# EAGLE board picotouchsynth (EAGLE 9.6.2)
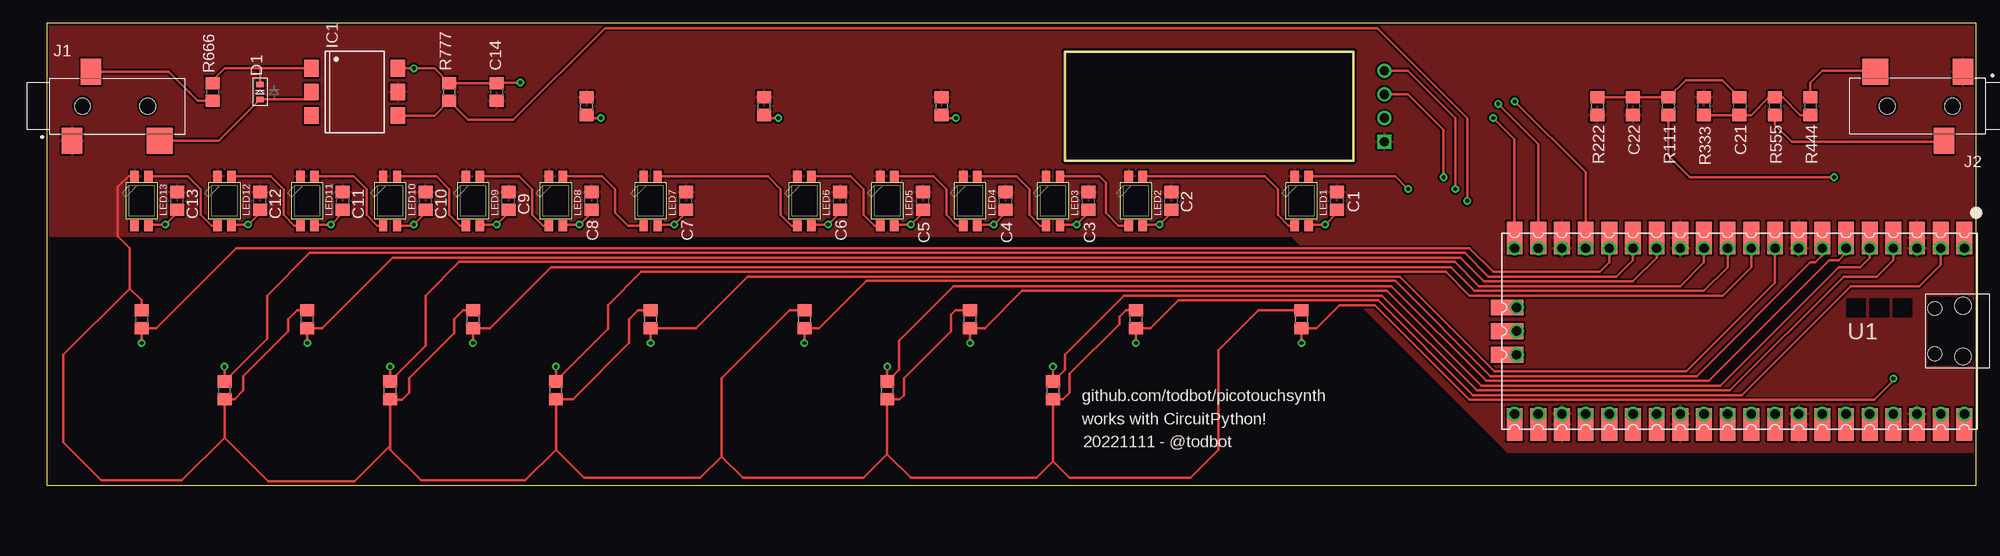
[diagram p0: board, top side]
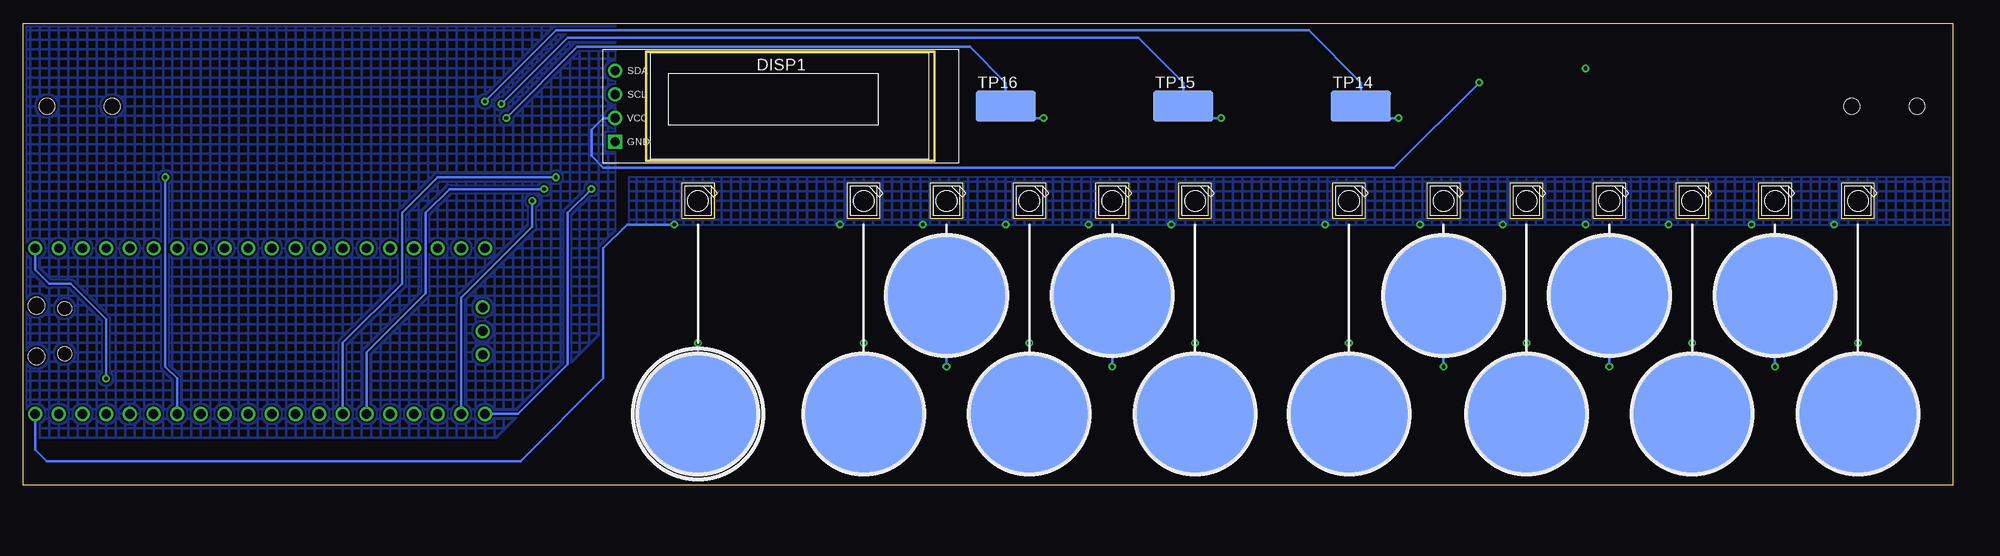
[diagram p1: board, bottom side, seen from below]

Size 207.01 x 49.53 mm. Coordinates in mm from the lower left corner, seen from the top.
Outline: 0,0 207.01,0 207.01,49.53 0,49.53 0,0
Outline: 140.21,46.48 109.22,46.48 109.22,34.8 140.21,34.8 140.21,46.48
Copper layers (1*16): Top 0.035mm / dielectric 1.5mm / Bottom 0.035mm
Design rules "adafruit-rules-20180530 *": minimum track width 10mil, minimum drill 16mil, track to track 8mil, track to pad 8mil, pad to pad 8mil, via to via 8mil, smd to smd 8mil, copper to edge 10mil, drill to drill 8mil, minimum pad ring 10mil, minimum via ring 8mil, stop-mask expansion 4mil, vias tented up to drill 20mil, thermal gap 10mil

## Footprints (pad centres in the part's own frame; a part is rotated, then mirrored left to right if it is on the bottom)
C0805 = smd 1.3 x 1.5: 1 -0.95,0; 2 0.95,0
SOD-523 = smd 0.8 x 0.6: A 0,-0.8; K 0,0.8
DISPLAY-OLED-128X32 = drill 1 square: 1 -17.78,-3.81 | drill 1: 2 -17.78,-1.27; 3 -17.78,1.27; 4 -17.78,3.81
DIL6-SMD = smd 1.78 x 1.52: 1 -2.54,-4.645; 2 0,-4.645; 3 2.54,-4.645; 4 2.54,4.645; 5 0,4.645; 6 -2.54,4.645
CUI_SJ-3523-SMT = smd 2.2 x 2.8: 1 -1.1,-3.7; 3 0.9,3.7 | smd 2.8 x 2.8: 2 8.3,-3.7 | hole 1.7: 0,0; 7,0
MICROBUILDER_NEO3535_REVERSE = smd 1.2 x 0.9 bottom: 1-VDD 2.65,-0.75; 2-DOUT 2.65,0.75; 3-GND -2.65,0.75; 4-DIN -2.65,-0.75
R0805 = smd 1.3 x 1.5: 1 -0.95,0; 2 0.95,0
TOUCHPADA = smd 12.7 x 12.7: TP 0,0
TOUCHPADB = smd 6.452 x 3.251: TP 0,0
PICO-PKG = drill 1: 1 -8.89,24.13; 2 -8.89,21.59; 3 -8.89,19.05; 4 -8.89,16.51; 5 -8.89,13.97; 6 -8.89,11.43; 7 -8.89,8.89; 8 -8.89,6.35; 9 -8.89,3.81; 10 -8.89,1.27; 11 -8.89,-1.27; 12 -8.89,-3.81; 13 -8.89,-6.35; 14 -8.89,-8.89; 15 -8.89,-11.43; 16 -8.89,-13.97; 17 -8.89,-16.51; 18 -8.89,-19.05; 19 -8.89,-21.59; 20 -8.89,-24.13; 21 8.89,-24.13; 22 8.89,-21.59; 23 8.89,-19.05; 24 8.89,-16.51; 25 8.89,-13.97; 26 8.89,-11.43; 27 8.89,-8.89; 28 8.89,-6.35; 29 8.89,-3.81; 30 8.89,-1.27; 31 8.89,1.27; 32 8.89,3.81; 33 8.89,6.35; 34 8.89,8.89; 35 8.89,11.43; 36 8.89,13.97; 37 8.89,16.51; 38 8.89,19.05; 39 8.89,21.59; 40 8.89,24.13; 41 -2.54,-23.9; 42 0,-23.9; 43 2.54,-23.9 | smd 3.5 x 1.7: P$1 -10,24.13; P$2 -10,21.59; P$3 -10,19.05; P$4 -10,16.51; P$5 -10,13.97; P$6 -10,11.43; P$7 -10,8.89; P$8 -10,6.35; P$9 -10,3.81; P$10 -10,1.27; P$11 -10,-1.27; P$12 -10,-3.81; P$13 -10,-6.35; P$14 -10,-8.89; P$15 -10,-11.43; P$16 -10,-13.97; P$17 -10,-16.51; P$18 -10,-19.05; P$19 -10,-21.59; P$20 -10,-24.13; P$21 10,-24.13; P$22 10,-21.59; P$23 10,-19.05; P$24 10,-16.51; P$25 10,-13.97; P$26 10,-11.43; P$27 10,-8.89; P$28 10,-6.35; P$29 10,-3.81; P$30 10,-1.27; P$31 10,1.27; P$32 10,3.81; P$33 10,6.35; P$34 10,8.89; P$35 10,11.43; P$36 10,13.97; P$37 10,16.51; P$38 10,19.05; P$39 10,21.59; P$40 10,24.13 | smd 1.7 x 3.5: P$41 -2.54,-24.925; P$42 0,-24.925; P$43 2.54,-24.925 | hole 1.8: -2.725,24; 2.725,24 | hole 1.5: -2.425,20.97; 2.425,20.97

## Placement (x,y rotation side)
C1  100n  [C0805]  138.43,30.48 90 top
C2  100n  [C0805]  120.65,30.48 90 top
C3  100n  [C0805]  111.76,30.48 90 top
C4  100n  [C0805]  102.87,30.48 90 top
C5  100n  [C0805]  93.98,30.48 90 top
C6  100n  [C0805]  85.09,30.48 90 top
C7  100n  [C0805]  68.58,30.48 90 top
C8  100n  [C0805]  58.42,30.48 90 top
C9  100n  [C0805]  49.53,30.48 90 top
C10  100n  [C0805]  40.64,30.48 90 top
C11  100n  [C0805]  31.75,30.48 90 top
C12  100n  [C0805]  22.86,30.48 90 top
C13  100n  [C0805]  13.97,30.48 90 top
C14  [C0805]  48.26,42.16 270 top
C21  47uF  [C0805]  181.61,40.64 270 top
C22  100n  [C0805]  170.18,40.64 270 top
D1  [SOD-523]  22.86,42.16 0 top
DISP1  DISPLAY-OLED-128X32  [DISPLAY-OLED-128X32]  125.73,40.64 0 bottom
IC1  H11L1MS  [DIL6-SMD]  33.02,42.16 270 top
J1  SJ-3523-SMT  [CUI_SJ-3523-SMT]  3.81,40.64 0 top
J2  SJ-3523-SMT  [CUI_SJ-3523-SMT]  204.47,40.64 180 top
LED1  MICROBUILDER_WS2812B_SK6812E  [MICROBUILDER_NEO3535_REVERSE]  134.62,30.48 270 bottom
LED2  MICROBUILDER_WS2812B_SK6812E  [MICROBUILDER_NEO3535_REVERSE]  116.84,30.48 270 bottom
LED3  MICROBUILDER_WS2812B_SK6812E  [MICROBUILDER_NEO3535_REVERSE]  107.95,30.48 270 bottom
LED4  MICROBUILDER_WS2812B_SK6812E  [MICROBUILDER_NEO3535_REVERSE]  99.06,30.48 270 bottom
LED5  MICROBUILDER_WS2812B_SK6812E  [MICROBUILDER_NEO3535_REVERSE]  90.17,30.48 270 bottom
LED6  MICROBUILDER_WS2812B_SK6812E  [MICROBUILDER_NEO3535_REVERSE]  81.28,30.48 270 bottom
LED7  MICROBUILDER_WS2812B_SK6812E  [MICROBUILDER_NEO3535_REVERSE]  64.77,30.48 270 bottom
LED8  MICROBUILDER_WS2812B_SK6812E  [MICROBUILDER_NEO3535_REVERSE]  54.61,30.48 270 bottom
LED9  MICROBUILDER_WS2812B_SK6812E  [MICROBUILDER_NEO3535_REVERSE]  45.72,30.48 270 bottom
LED10  MICROBUILDER_WS2812B_SK6812E  [MICROBUILDER_NEO3535_REVERSE]  36.83,30.48 270 bottom
LED11  MICROBUILDER_WS2812B_SK6812E  [MICROBUILDER_NEO3535_REVERSE]  27.94,30.48 270 bottom
LED12  MICROBUILDER_WS2812B_SK6812E  [MICROBUILDER_NEO3535_REVERSE]  19.05,30.48 270 bottom
LED13  MICROBUILDER_WS2812B_SK6812E  [MICROBUILDER_NEO3535_REVERSE]  10.16,30.48 270 bottom
R1  [R0805]  134.62,17.78 90 top
R2  [R0805]  116.84,17.78 90 top
R3  [R0805]  107.95,10.16 270 top
R4  [R0805]  99.06,17.78 90 top
R5  [R0805]  90.17,10.16 270 top
R6  [R0805]  81.28,17.78 90 top
R7  [R0805]  64.77,17.78 90 top
R8  [R0805]  54.61,10.16 270 top
R9  [R0805]  45.72,17.78 90 top
R10  [R0805]  36.83,10.16 270 top
R11  [R0805]  27.94,17.78 90 top
R12  [R0805]  19.05,10.16 270 top
R13  [R0805]  10.16,17.78 90 top
R14  [R0805]  57.91,40.64 90 top
R15  [R0805]  76.96,40.64 90 top
R16  [R0805]  96.01,40.64 90 top
R111  220  [R0805]  173.99,40.64 270 top
R222  100  [R0805]  166.37,40.64 90 top
R333  1.8k  [R0805]  177.8,40.64 90 top
R444  33  [R0805]  189.23,40.64 270 top
R555  33  [R0805]  185.42,40.64 90 top
R666  220  [R0805]  17.78,42.16 270 top
R777  4.70k  [R0805]  43.18,42.16 270 top
TP1  TOUCHPADA  [TOUCHPADA]  134.62,7.62 0 bottom
TP2  TOUCHPADA  [TOUCHPADA]  116.84,7.62 0 bottom
TP3  TOUCHPADA  [TOUCHPADA]  107.95,20.32 0 bottom
TP4  TOUCHPADA  [TOUCHPADA]  99.06,7.62 0 bottom
TP5  TOUCHPADA  [TOUCHPADA]  90.17,20.32 0 bottom
TP6  TOUCHPADA  [TOUCHPADA]  81.28,7.62 90 bottom
TP7  TOUCHPADA  [TOUCHPADA]  64.77,7.62 0 bottom
TP8  TOUCHPADA  [TOUCHPADA]  54.61,20.32 0 bottom
TP9  TOUCHPADA  [TOUCHPADA]  45.72,7.62 0 bottom
TP10  TOUCHPADA  [TOUCHPADA]  36.83,20.32 0 bottom
TP11  TOUCHPADA  [TOUCHPADA]  27.94,7.62 0 bottom
TP12  TOUCHPADA  [TOUCHPADA]  19.05,20.32 0 bottom
TP13  TOUCHPADA  [TOUCHPADA]  10.16,7.62 0 bottom
TP14  TOUCHPADB  [TOUCHPADB]  63.5,40.64 0 bottom
TP15  TOUCHPADB  [TOUCHPADB]  82.55,40.64 0 bottom
TP16  TOUCHPADB  [TOUCHPADB]  101.6,40.64 0 bottom
U1  RASPBERRY_PICOSMD-TH  [PICO-PKG]  181.61,16.51 270 top

## Library data of the parts
C1-C14 C21 C22 = rcl; SPICEPREFIX: C
D1 = adafruit
DISP1 = diy-modules
IC1 = optocoupler; OC_FARNELL: unknown; OC_NEWARK: unknown
J1 J2 = SJ-3523-SMT; CUI_PURCHASE_URL: https://www.cuidevices.com/product/interconnect/connectors/audio-connectors/jacks/sj-352x-smt-series?utm_source=snapeda.com&utm_medium=referral&utm_campaign=snapedaBOM; DESCRIPTION: 3.5 mm, Stereo, Right Angle, Surface Mount (SMT), 3 Conductors, 0~1 Internal Switches, Audio Jack Connector; DIGI-KEY_PART_NUMBER: CP-3523SJCT-ND; MF: CUI Devices; MP: SJ-3523-SMT-TR; PACKAGE: None; PURCHASE-URL: https://pricing.snapeda.com/search/part/SJ-3523-SMT-TR/?ref=eda
LED1-LED13 = Adafruit MacroPad 2040
R1-R16 R111 R222 R333 R444 R555 R666 R777 = rcl; SPICEPREFIX: R
TP1-TP16 = todstuff
U1 = RpiPico

## Nets
+3V3: C14.1 DISP1.2 IC1.6 R777.1 U1.36 U1.P$36
+5V: C1.1 C2.1 C3.1 C4.1 C5.1 C6.1 C7.1 C8.1 C9.1 C10.1 C11.1 C12.1 C13.1 LED1.1-VDD LED2.1-VDD LED3.1-VDD LED4.1-VDD LED5.1-VDD LED6.1-VDD LED7.1-VDD LED8.1-VDD LED9.1-VDD LED10.1-VDD LED11.1-VDD LED12.1-VDD LED13.1-VDD U1.40 U1.P$40
GND: C1.2 C2.2 C3.2 C4.2 C5.2 C6.2 C7.2 C8.2 C9.2 C10.2 C11.2 C12.2 C13.2 C14.2 C22.2 DISP1.1 IC1.5 J1.1 J2.1 LED1.3-GND LED2.3-GND LED3.3-GND LED4.3-GND LED5.3-GND LED6.3-GND LED7.3-GND LED8.3-GND LED9.3-GND LED10.3-GND LED11.3-GND LED12.3-GND LED13.3-GND R1.2 R2.2 R3.2 R4.2 R5.2 R6.2 R7.2 R8.2 R9.2 R10.2 R11.2 R12.2 R13.2 R14.2 R15.2 R16.2 R222.1 R333.2 U1.3 U1.8 U1.13 U1.18 U1.23 U1.28 U1.33 U1.38 U1.P$3 U1.P$8 U1.P$13 U1.P$18 U1.P$23 U1.P$28 U1.P$33 U1.P$38
LED_DATA: LED1.4-DIN U1.21 U1.P$21
MIDI_IN: IC1.4 R777.2 U1.22 U1.P$22
N$1: LED1.2-DOUT LED2.4-DIN
N$2: LED2.2-DOUT LED3.4-DIN
N$3: LED4.2-DOUT LED5.4-DIN
N$4: LED5.2-DOUT LED6.4-DIN
N$5: LED3.2-DOUT LED4.4-DIN
N$6: LED7.2-DOUT LED8.4-DIN
N$7: LED8.2-DOUT LED9.4-DIN
N$8: LED10.2-DOUT LED11.4-DIN
N$9: LED11.2-DOUT LED12.4-DIN
N$10: LED9.2-DOUT LED10.4-DIN
N$11: LED6.2-DOUT LED7.4-DIN
N$12: LED12.2-DOUT LED13.4-DIN
N$13: D1.K IC1.1 R666.1
N$14: D1.A IC1.2 J1.2
N$15: J1.3 R666.2
N$44: J2.2 R444.1
N$46: J2.3 R555.1
N$47: C21.2 R333.1 R444.2 R555.2
N$48: C21.1 C22.1 R111.1 R222.2
PWM_AUDIO: R111.2 U1.34 U1.P$34
SCL: DISP1.3 U1.27 U1.P$27
SDA: DISP1.4 U1.26 U1.P$26
SWGND: U1.42 U1.P$42
T1: R1.1 TP1.TP U1.1 U1.P$1
T2: R2.1 TP2.TP U1.2 U1.P$2
T3: R3.1 TP3.TP U1.4 U1.P$4
T4: R4.1 TP4.TP U1.5 U1.P$5
T5: R5.1 TP5.TP U1.6 U1.P$6
T6: R6.1 TP6.TP U1.7 U1.P$7
T7: R7.1 TP7.TP U1.9 U1.P$9
T8: R8.1 TP8.TP U1.10 U1.P$10
T9: R9.1 TP9.TP U1.11 U1.P$11
T10: R10.1 TP10.TP U1.12 U1.P$12
T11: R11.1 TP11.TP U1.14 U1.P$14
T12: R12.1 TP12.TP U1.15 U1.P$15
T13: R13.1 TP13.TP U1.16 U1.P$16
T14: R14.1 TP14.TP U1.17 U1.P$17
T15: R15.1 TP15.TP U1.19 U1.P$19
T16: R16.1 TP16.TP U1.20 U1.P$20
VSYS: U1.39 U1.P$39

## Tracks (layer width: path | path; a pad name or v marks a point on that pad's centre or on a via)
+3V3  (via drill 0.41)
  Top 0.254: U1.P$36 U1.36 | IC1.6 v39.37,44.7 41.59,44.7 R777.1 C14.1 48.33,43.18 v50.8,43.18
  Bottom 0.254: v50.8,43.18 59.94,34.04 144.78,34.04 146.05,35.31 146.05,38.1 144.78,39.37 DISP1.2
  pour Bottom (hatched): 143.51,54.61 143.51,17.78 156.21,5.08 207.01,5.08 207.01,54.61
+5V  (via drill 0.41)
  Top 0.254: U1.P$40 U1.40 | LED13.1-VDD 11.02,27.94 v12.7,27.94 13.97,29.21 C13.1 | LED12.1-VDD 19.91,27.94 v21.59,27.94 22.86,29.21 C12.1 | LED11.1-VDD 28.8,27.94 v30.48,27.94 31.75,29.21 C11.1 | LED10.1-VDD 39.26,27.83 v39.37,27.94 40.64,29.21 C10.1 | LED7.1-VDD 65.63,27.94 v67.31,27.94 68.58,29.21 C7.1 | LED6.1-VDD 82.14,27.94 v83.82,27.94 85.09,29.21 C6.1 | LED5.1-VDD 91.03,27.94 v92.71,27.94 93.98,29.21 C5.1 | LED4.1-VDD 99.92,27.94 v101.6,27.94 102.87,29.21 C4.1 | LED3.1-VDD 108.81,27.94 v110.49,27.94 111.76,29.21 C3.1 | LED2.1-VDD 117.7,27.94 v119.38,27.94 120.65,29.21 C2.1 | LED1.1-VDD 135.48,27.94 v137.16,27.94 138.43,29.21 C1.1 | C8.1 58.42,29.21 v57.15,27.94 55.47,27.94 LED8.1-VDD | LED9.1-VDD 46.58,27.94 v48.26,27.94 49.53,29.21 C9.1
  Bottom 0.254: U1.40 205.74,3.81 204.47,2.54 153.67,2.54 144.78,11.43 144.78,25.4 142.24,27.94 v137.16,27.94
  pour Bottom (hatched): -1.27,33.02 141.99,33.02 141.99,27.92 -1.27,27.92
GND
  Top 0.254: 19.05,5.08 R12.2 20.13,9.21 21.08,10.16 21.08,11.68 25.91,16.51 25.91,17.78 26.86,18.73 R11.2 | 19.05,5.08 23.75,0.38 33.02,0.38 36.83,4.19 | 36.83,4.19 36.83,9.14 | 36.83,9.14 R10.2 | R9.2 44.64,18.73 43.69,17.78 43.69,16.26 38.86,11.43 38.86,9.91 38.1,9.14 36.83,9.14 | R6.2 79.69,18.73 72.39,11.43 72.39,3.05 | 54.61,3.81 51.31,0.51 40.13,0.51 36.83,3.81 36.83,4.19 | 90.17,3.3 R5.2 91.51,9.21 91.95,9.65 91.95,11.43 97.03,16.51 97.03,18.29 97.47,18.73 R4.2 | 72.39,3.05 74.68,0.76 87.63,0.76 90.17,3.3 | 107.95,2.54 R3.2 109.03,9.21 109.73,9.91 109.73,11.94 115.06,17.27 115.06,18.03 115.76,18.73 R2.2 | 90.17,3.3 92.71,0.76 106.17,0.76 107.95,2.54 | 19.05,5.08 14.48,0.51 5.84,0.51 1.78,4.57 1.78,13.97 8.89,21.08 | 8.89,21.08 8.89,25.4 7.62,26.67 7.62,31.97 8.78,33.13 LED13.3-GND | R13.2 10.16,19.81 8.89,21.08 | 72.39,3.05 70.1,0.76 57.66,0.76 54.61,3.81 | 107.95,2.54 109.73,0.76 122.68,0.76 125.73,3.81 125.73,14.48 129.98,18.73 R1.2 | U1.P$18 U1.18 | U1.P$13 U1.13 | U1.P$8 U1.8 | U1.P$3 U1.3 | U1.P$38 U1.38 | U1.P$33 U1.33 | U1.P$28 U1.28 | U1.P$23 U1.23 | 54.61,3.81 R8.2 56.45,9.21 62.48,15.24 62.48,17.78 63.43,18.73 R7.2
  pour Top: 0,50.24 209.32,50.24 209.32,3.56 156.72,3.56 133.53,26.75 0,26.75
LED_DATA  (via drill 0.41)
  Top 0.254: U1.P$21 U1.21 | LED1.4-DIN 144.67,33.13 v146.05,31.75
  Bottom 0.254: U1.21 153.92,7.62 148.59,12.95 148.59,29.21 v146.05,31.75
MIDI_IN  (via drill 0.41)
  Top 0.254: IC1.4 41.59,39.62 R777.2 45.21,39.18 50.04,39.18 59.88,49.02 142.75,49.02 152.4,39.37 v152.4,30.48 | U1.P$22 U1.22
  Bottom 0.254: U1.22 160.02,20.07 152.4,27.69 v152.4,30.48
N$1
  Top 0.254: LED2.4-DIN 130.7,33.13 132.08,31.75 132.08,28.99 133.24,27.83 LED1.2-DOUT
N$2
  Top 0.254: LED3.4-DIN 112.92,33.13 113.62,32.43 113.62,29.21 115,27.83 LED2.2-DOUT
N$3
  Top 0.254: LED5.4-DIN 95.14,33.13 96.52,31.75 96.52,28.99 97.68,27.83 LED4.2-DOUT
N$4
  Top 0.254: LED6.4-DIN 86.25,33.13 87.63,31.75 87.63,28.99 88.79,27.83 LED5.2-DOUT
N$5
  Top 0.254: LED4.4-DIN 104.03,33.13 105.41,31.75 105.41,28.99 106.57,27.83 LED3.2-DOUT
N$6
  Top 0.254: LED8.4-DIN 59.58,33.13 60.96,31.75 60.96,29.21 62.34,27.83 LED7.2-DOUT
N$7
  Top 0.254: LED9.4-DIN 50.69,33.13 52.07,31.75 52.07,28.99 53.23,27.83 LED8.2-DOUT
N$8
  Top 0.254: LED11.4-DIN 32.91,33.13 34.29,31.75 34.29,28.99 35.45,27.83 LED10.2-DOUT
N$9
  Top 0.254: LED12.4-DIN 24.02,33.13 25.4,31.75 25.4,28.99 26.56,27.83 LED11.2-DOUT
N$10
  Top 0.254: LED10.4-DIN 41.8,33.13 43.18,31.75 43.18,28.99 44.34,27.83 LED9.2-DOUT
N$11
  Top 0.254: LED7.4-DIN 77.36,33.13 78.74,31.75 78.74,28.99 79.9,27.83 LED6.2-DOUT
N$12
  Top 0.254: LED13.4-DIN 15.13,33.13 16.51,31.75 16.51,28.99 17.67,27.83 LED12.2-DOUT
N$13
  Top 0.254: IC1.1 22.86,44.7 | 22.86,44.7 19.05,44.7 17.78,43.43 R666.1 | D1.K 22.86,44.7
N$14
  Top 0.254: IC1.2 27.61,41.4 22.86,41.4 D1.A 18.44,36.94 J1.2
N$15
  Top 0.254: R666.2 16.19,41.21 15.37,42.04 15.24,42.16 13.06,44.34 J1.3
N$44
  Top 0.254: R444.1 189.23,43.18 190.5,44.45 196.06,44.45 J2.2
N$46
  Top 0.254: R555.1 185.42,38.61 187.2,36.83 203.46,36.83 J2.3
N$47
  Top 0.254: R444.2 188.15,39.69 186.25,41.59 R555.2 184.78,41.59 182.88,39.69 C21.2 R333.1
N$48
  Top 0.254: R222.2 C22.1 R111.1 175.83,43.43 179.77,43.43 C21.1
PWM_AUDIO  (via drill 0.41)
  Top 0.254: R111.2 173.99,35.31 176.28,33.02 v191.77,33.02
  Top 0.406: U1.P$34 U1.34
  Bottom 0.254: U1.34 190.5,11.43 191.77,12.7 v191.77,33.02
SCL  (via drill 0.41)
  Top 0.254: v149.86,33.02 149.86,38.1 146.05,41.91 DISP1.3 | U1.P$27 U1.27
  Bottom 0.254: U1.27 172.72,15.24 166.37,21.59 166.37,29.21 162.56,33.02 v149.86,33.02
SDA  (via drill 0.41)
  Top 0.254: U1.P$26 U1.26 | v151.13,31.75 151.13,39.37 146.05,44.45 DISP1.4
  Bottom 0.254: U1.26 170.18,14.22 163.83,20.57 163.83,29.21 161.29,31.75 v151.13,31.75
SWGND
  Top 0.254: U1.P$42 U1.42
T1  (via drill 0.41)
  Top 0.254: v134.62,15.24 R1.1 136.21,16.83 138.68,19.3 142.49,19.3 152.65,9.14 196.09,9.14 198.12,11.18 v198.12,11.43 | U1.P$1 U1.1
  Bottom 0.254: v134.62,15.24 TP1.TP | v198.12,11.43 198.12,17.78 201.93,21.59 204.22,21.59 205.74,23.11 U1.1
T2  (via drill 0.41)
  Top 0.254: v116.84,15.24 R2.1 118.43,16.83 121.41,19.81 142.86,19.81 153.02,9.65 181.86,9.65 193.55,21.34 200.91,21.34 203.2,23.62 U1.2 U1.P$2
  Bottom 0.254: v116.84,15.24 TP2.TP
T3  (via drill 0.41)
  Top 0.254: v107.95,12.7 R3.1 109.22,12.38 109.22,13.97 115.57,20.32 143.26,20.32 153.42,10.16 180.59,10.16 192.79,22.35 196.34,22.35 198.12,24.13 U1.4 U1.P$4
  Bottom 0.254: v107.95,12.7 TP3.TP
T4  (via drill 0.41)
  Top 0.254: v99.06,15.24 R4.1 100.65,16.83 104.65,20.83 143.76,20.83 153.92,10.67 179.58,10.67 192.28,23.37 194.56,23.37 195.58,24.38 U1.P$5 U1.5
  Bottom 0.254: v99.06,15.24 TP4.TP
T5  (via drill 0.41)
  Top 0.254: v90.17,12.7 R5.1 91.44,12.38 91.44,15.49 97.28,21.34 144.27,21.34 154.43,11.18 178.31,11.18 191.26,24.13 192.28,24.13 193.04,24.89 U1.P$6 U1.6
  Bottom 0.254: v90.17,12.7 TP5.TP
T6  (via drill 0.41)
  Top 0.254: v81.28,15.24 R6.1 82.87,16.83 87.94,21.89 144.68,21.89 154.89,11.68 177.04,11.68 189.23,23.88 189.74,23.88 190.5,24.64 U1.P$7 U1.7
  Bottom 0.254: v81.28,15.24 TP6.TP
T7  (via drill 0.41)
  Top 0.254: v64.77,15.24 R7.1 69.66,16.83 75.18,22.35 145.15,22.35 155.31,12.19 175.92,12.19 185.42,21.69 U1.P$9 U1.9
  Bottom 0.254: TP7.TP v64.77,15.24
T8  (via drill 0.41)
  Top 0.254: v54.61,12.7 R8.1 54.61,11.18 60.2,16.76 60.2,19.3 63.75,22.86 150.11,22.86 152.65,20.32 179.83,20.32 182.88,23.37 U1.P$10 U1.10
  Bottom 0.254: TP8.TP v54.61,12.7
T9  (via drill 0.41)
  Top 0.254: v45.72,15.24 R9.1 47.56,16.83 54.1,23.37 150.62,23.37 153.16,20.83 177.8,20.83 180.34,23.37 U1.11 U1.P$11
  Bottom 0.254: v45.72,15.24 TP9.TP
T10  (via drill 0.41)
  Top 0.254: v36.83,12.7 R10.1 40.64,14.92 40.64,20.32 44.25,23.93 151.08,23.93 153.67,21.34 175.26,21.34 177.8,23.88 U1.12 U1.P$12
  Bottom 0.254: v36.83,12.7 TP10.TP
T11  (via drill 0.41)
  Top 0.254: v27.94,15.24 R11.1 29.53,16.83 37.08,24.38 151.64,24.38 154.18,21.84 170.18,21.84 172.72,24.38 U1.14 U1.P$14
  Bottom 0.254: v27.94,15.24 TP11.TP
T12  (via drill 0.41)
  Top 0.254: v19.05,12.7 R12.1 23.62,15.68 23.62,20.32 28.19,24.89 152.15,24.89 154.69,22.35 168.4,22.35 170.18,24.13 U1.15 U1.P$15
  Bottom 0.254: v19.05,12.7 TP12.TP
T13  (via drill 0.41)
  Top 0.254: v10.16,15.24 R13.1 11.75,16.83 20.32,25.4 152.65,25.4 155.19,22.86 166.62,22.86 167.64,23.88 U1.16 U1.P$16
  Bottom 0.254: v10.16,15.24 TP13.TP
T14  (via drill 0.41)
  Top 0.254: v59.44,39.37 58.23,39.37 R14.1 | U1.17 U1.P$17 165.1,33.53 v157.48,41.15
  Bottom 0.254: v59.44,39.37 62.23,39.37 TP14.TP 63.5,43.18 69.09,48.77 149.86,48.77 v157.48,41.15
T15  (via drill 0.41)
  Top 0.254: U1.19 U1.P$19 160.02,36.58 v155.7,40.89 | v78.49,39.37 77.28,39.37 R15.1
  Bottom 0.254: v78.49,39.37 81.28,39.37 TP15.TP 82.55,43.18 87.38,48.01 148.59,48.01 v155.7,40.89
T16  (via drill 0.41)
  Top 0.254: U1.20 U1.P$20 157.48,37.08 v155.19,39.37 | v97.54,39.37 96.33,39.37 R16.1
  Bottom 0.254: v97.54,39.37 100.33,39.37 TP16.TP 101.6,43.18 105.41,46.99 147.57,46.99 v155.19,39.37
VSYS
  Top 0.254: U1.P$39 U1.39

## Text on the board
tPlace: github.com/todbot/picotouchsynth | works with CircuitPython! | 20221111 - @todbot